# EAGLE board board (EAGLE 9.6.2)
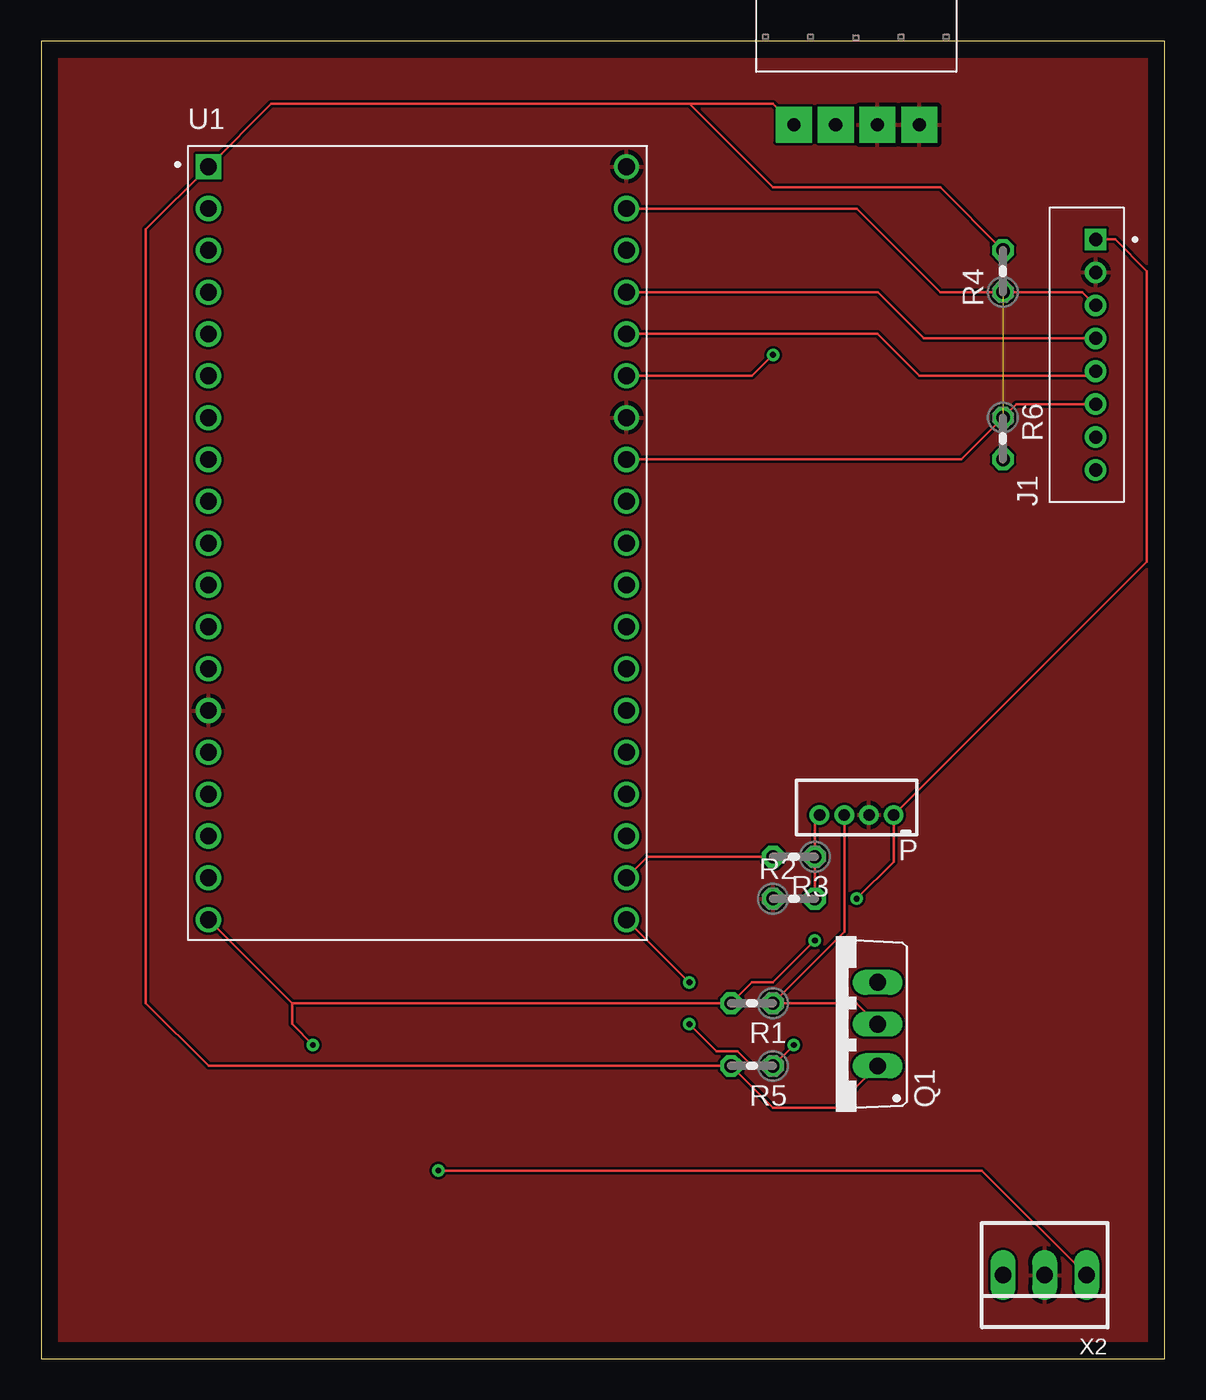
[diagram p0: board, top side]
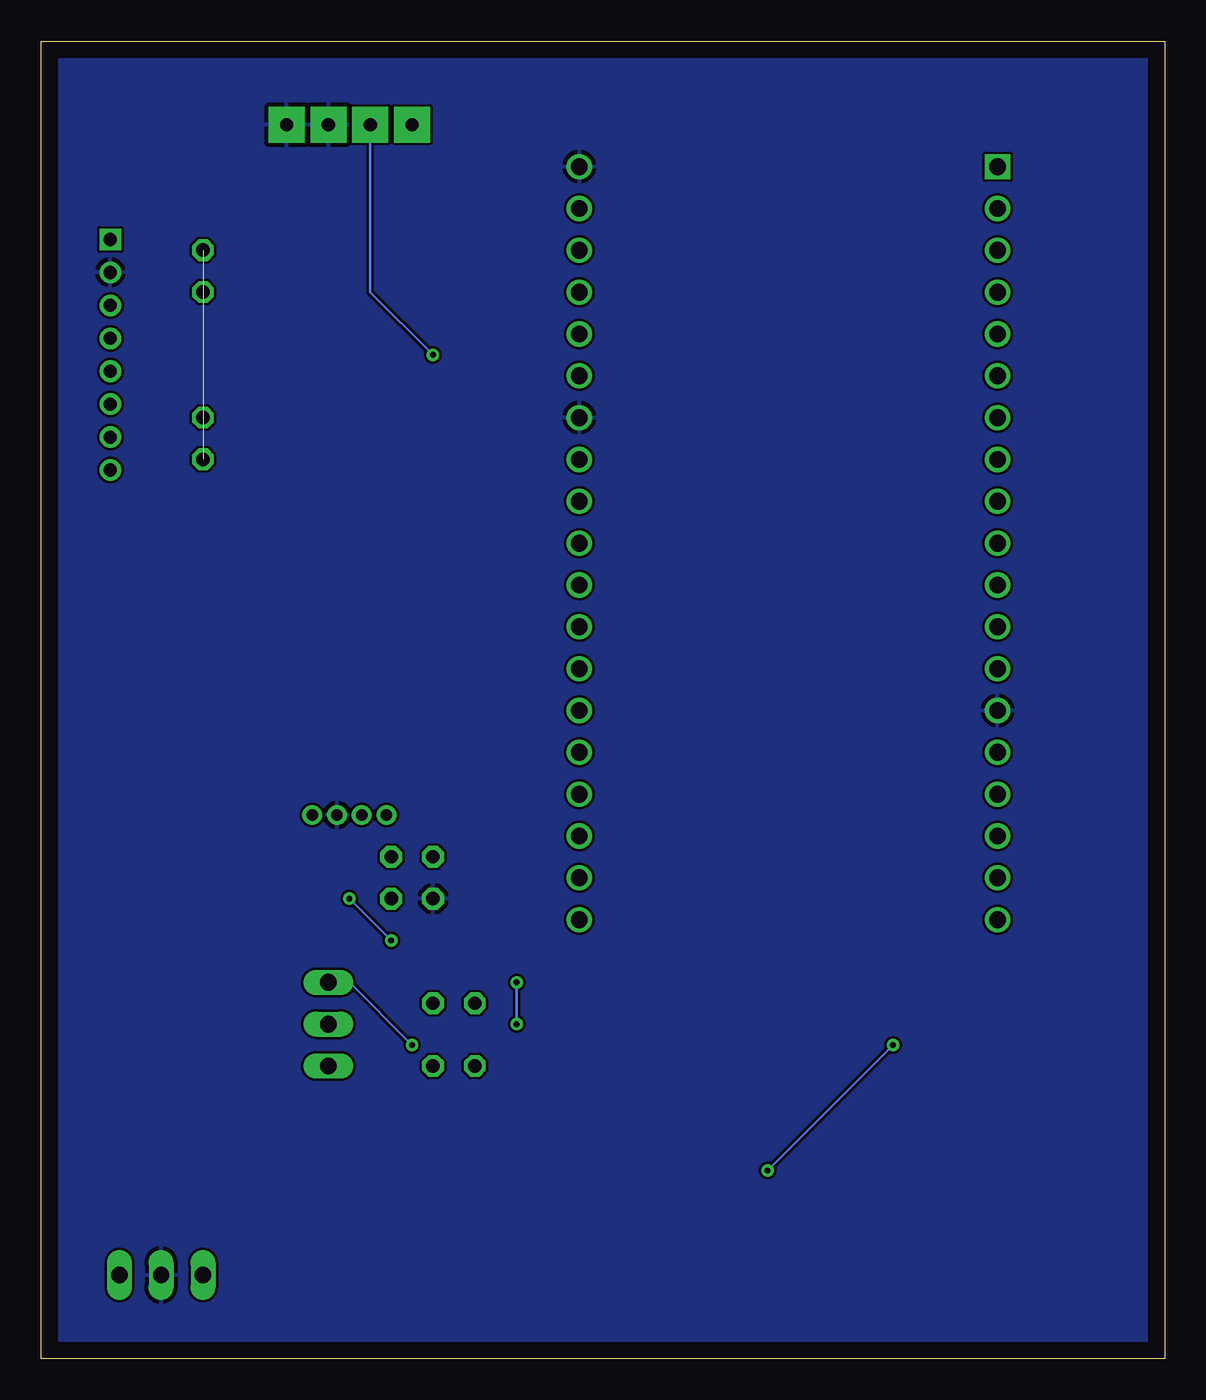
[diagram p1: board, bottom side, seen from below]

Size 68.25 x 80 mm. Coordinates in mm from the lower left corner, seen from the top.
Outline: 0,0 68.25,0 68.25,80 0,80 0,0
Copper layers (1*16): Top 0.035mm / dielectric 1.5mm / Bottom 0.035mm
Design rules "default": minimum track width 6mil, minimum drill 0.35mm, track to track 6mil, track to pad 6mil, pad to pad 6mil, via to via 6mil, smd to smd 6mil, copper to edge 40mil, drill to drill 6mil, minimum pad ring 10mil, minimum via ring 8mil, stop-mask expansion 4mil, vias tented up to drill 0mil, thermal gap 10mil

## Footprints (pad centres in the part's own frame; a part is rotated, then mirrored left to right if it is on the bottom)
AM2320 = drill 0.8 pad 2.184 square: GND 1.27,-11.43; SCL 3.81,-11.43; SDA -1.27,-11.43; VDD -3.81,-11.43
JST_B8B-PH-K-S(LF)(SN) = drill 0.8 square: 1 7,-0.55 | drill 0.8: 2 5,-0.55; 3 3,-0.55; 4 1,-0.55; 5 -1,-0.55; 6 -3,-0.55; 7 -5,-0.55; 8 -7,-0.55
B4B-ZR = drill 0.7 pad 1.1: 1 -2.25,0; 2 -0.75,0; 3 0.75,0; 4 2.25,0
TO220BV = drill 1.016 long: D 0,-2.54; G -2.54,-2.54; S 2.54,-2.54
0204V = drill 0.813 octagon: 1 -1.27,0; 2 1.27,0
MODULE_ESP32-DEVKITC-32U = drill 1.02 square: 1 -12.7,22.85 | drill 1.02: 2 -12.7,20.31; 3 -12.7,17.77; 4 -12.7,15.23; 5 -12.7,12.69; 6 -12.7,10.15; 7 -12.7,7.61; 8 -12.7,5.07; 9 -12.7,2.53; 10 -12.7,-0.01; 11 -12.7,-2.55; 12 -12.7,-5.09; 13 -12.7,-7.63; 14 -12.7,-10.17; 15 -12.7,-12.71; 16 -12.7,-15.25; 17 -12.7,-17.79; 18 -12.7,-20.33; 19 -12.7,-22.87; 20 12.7,-22.87; 21 12.7,-20.33; 22 12.7,-17.79; 23 12.7,-15.25; 24 12.7,-12.71; 25 12.7,-10.17; 26 12.7,-7.63; 27 12.7,-5.09; 28 12.7,-2.55; 29 12.7,-0.01; 30 12.7,2.53; 31 12.7,5.07; 32 12.7,7.61; 33 12.7,10.15; 34 12.7,12.69; 35 12.7,15.23; 36 12.7,17.77; 37 12.7,20.31; 38 12.7,22.85
22-23-2031 = drill 1 long: 1 -2.54,0; 2 0,0; 3 2.54,0

## Placement (x,y rotation side)
IC1  AM2320  [AM2320]  49.53,86.36 0 top
J1  B8B-PH-K-S(LF)(SN)  [JST_B8B-PH-K-S(LF)(SN)]  63.5,60.96 90 top
P  B4B-ZR  [B4B-ZR]  49.53,33.02 180 top
Q1  IRF540  [TO220BV]  48.26,20.32 90 top
R1  10k  [0204V]  43.18,21.59 180 top
R2  6.8K  [0204V]  45.72,27.94 0 top
R3  3.3k  [0204V]  45.72,30.48 180 top
R4  10k  [0204V]  58.42,66.04 90 top
R5  10k  [0204V]  43.18,17.78 180 top
R6  10k  [0204V]  58.42,55.88 270 top
U1  ESP32-DEVKITC-32U  [MODULE_ESP32-DEVKITC-32U]  22.86,49.53 0 top
X2  22-23-2031  [22-23-2031]  60.96,5.08 180 top

## Library data of the parts
IC1 = am2320
J1 = B8B-PH-K-S_LF__SN_; AVAILABILITY: In Stock; CHECK_PRICES: https://www.snapeda.com/parts/B8B-PH-K-S(LF)(SN)/JST+Sales+America+Inc./view-part/?ref=eda; DESCRIPTION: Connector Header Through Hole 8 position 0.079 (2.00mm); MF: JST Sales; MP: B8B-PH-K-S(LF)(SN); PACKAGE: None; PRICE: None; SNAPEDA_LINK: https://www.snapeda.com/parts/B8B-PH-K-S(LF)(SN)/JST+Sales+America+Inc./view-part/?ref=snap
P = con-jst; MF: FARNELL; MPN: B4B-ZR(LF)(SN); OC_FARNELL: 1830916; OC_NEWARK: 37K9960
Q1 = transistor-power
R1-R6 = rcl; SPICEPREFIX: R
U1 = ESP32-DEVKITC-32U; MANUFACTURER: Espressif Systems; MAXIMUM_PACKAGE_HEIGHT: N/A; PARTREV: V4; STANDARD: Manufacturer Recommendations
X2 = con-molex; MF: MOLEX; MPN: 22-23-2031; OC_FARNELL: 1462950; OC_NEWARK: 30C0862

## Nets
EN: U1.2
GND: IC1.GND IC1.SCL J1.2 P.2 R2.1 U1.14 U1.32 U1.38 X2.2
GPIO00: U1.25
GPIO02: U1.24
GPIO04: U1.26
GPIO05: U1.29
GPIO06: Q1.S R5.1 U1.20
GPIO06_5V: P.3 Q1.D R1.1
GPIO07: R3.2 U1.21
GPIO08: U1.22
GPIO09: U1.16
GPIO10: U1.17
GPIO11: U1.18
GPIO12: U1.13
GPIO13: U1.15
GPIO14: U1.12
GPIO15: U1.23
GPIO16: U1.27
GPIO17: U1.28
GPIO18: U1.30
GPIO19: J1.6 R6.1 U1.31
GPIO23: J1.3 R4.1 U1.37
GPIO25: U1.9
GPIO26: U1.10
GPIO27: U1.11
GPIO32: U1.7
GPIO33: U1.8
GPIO34: U1.5
GPIO35: U1.6
GPIO36: U1.3
GPIO39: U1.4
I2C_SCL: U1.36
I2C_SDA: IC1.SDA U1.33
N$2: P.4 R2.2 R3.1
UART_RX: J1.5 U1.34
UART_TX: J1.4 U1.35
VCC_3.3V: IC1.VDD Q1.G R4.2 R5.2 R6.2 U1.1
VCC_5V: J1.1 P.1 R1.2 U1.19 X2.1
VIN: X2.3

## Tracks (layer width: path | path; a pad name or v marks a point on that pad's centre or on a via)
GND
  pour Bottom: 0,80.01 0,0 68.58,0 68.58,80.01
  pour Top: 0,80.01 0,0 68.58,0 68.58,80.01
GPIO06  (via drill 0.35)
  Top 0.152: v45.72,19.05 R5.1 43.17,17.78 42.28,18.67 41.02,18.67 v39.37,20.32 | U1.20 v39.36,22.86 v39.37,22.86
  Bottom 0.152: v45.72,19.05 49.53,22.86 Q1.S | v39.37,22.86 v39.37,20.32
GPIO06_5V
  Top 0.152: Q1.D 49.53,21.59 R1.1 48.78,25.92 P.3
GPIO07
  Top 0.152: U1.21 36.84,30.48 R3.2
GPIO19
  Top 0.152: U1.31 55.88,54.61 R6.1 59.23,57.96 J1.6
GPIO23
  Top 0.152: U1.37 49.54,69.84 54.61,64.77 R4.1 63.24,64.77 J1.3
I2C_SDA  (via drill 0.35)
  Top 0.152: U1.33 43.17,59.68 v44.45,60.96
  Bottom 0.152: v44.45,60.96 48.26,64.77 IC1.SDA
N$2
  Top 0.152: P.4 46.99,32.73 R3.1 R2.2
UART_RX
  Top 0.152: U1.34 50.8,62.23 53.34,59.69 63.78,59.69 J1.5
UART_TX
  Top 0.152: U1.35 50.81,64.76 53.61,61.96 J1.4
VCC_3.3V  (1 unrouted)
  Top 0.152: IC1.VDD 44.45,76.2 39.37,76.2 | 39.37,76.2 13.97,76.2 U1.1 6.36,68.58 6.35,68.58 6.35,21.59 10.16,17.78 R5.2 44.45,15.24 48.26,15.24 Q1.G | 39.37,76.2 44.45,71.12 54.61,71.12 R4.2
VCC_5V  (via drill 0.35)
  Top 0.152: J1.1 65.24,67.96 67.16,66.04 67.16,48.4 P.1 51.78,30.19 v49.53,27.94 | 15.23,21.59 R1.2 43.18,22.86 44.45,22.86 v46.99,25.4 | 15.23,21.59 U1.19 | X2.1 57.15,11.43 v24.13,11.43 | v16.51,19.05 15.23,20.33 15.23,21.59
  Bottom 0.152: v49.53,27.94 v46.99,25.4 | v24.13,11.43 v16.51,19.05